# Altium PCB LED Bar Graph Voltage Display.PcbDoc
Units mil, origin at the board's own origin, x right, y up, seen from the top; angles counter-clockwise.
Board outline 1875 x 2290 mil, 2 copper layers (Top Layer, Bottom Layer); 31 components, 27 nets, 92 pads, 17 vias.
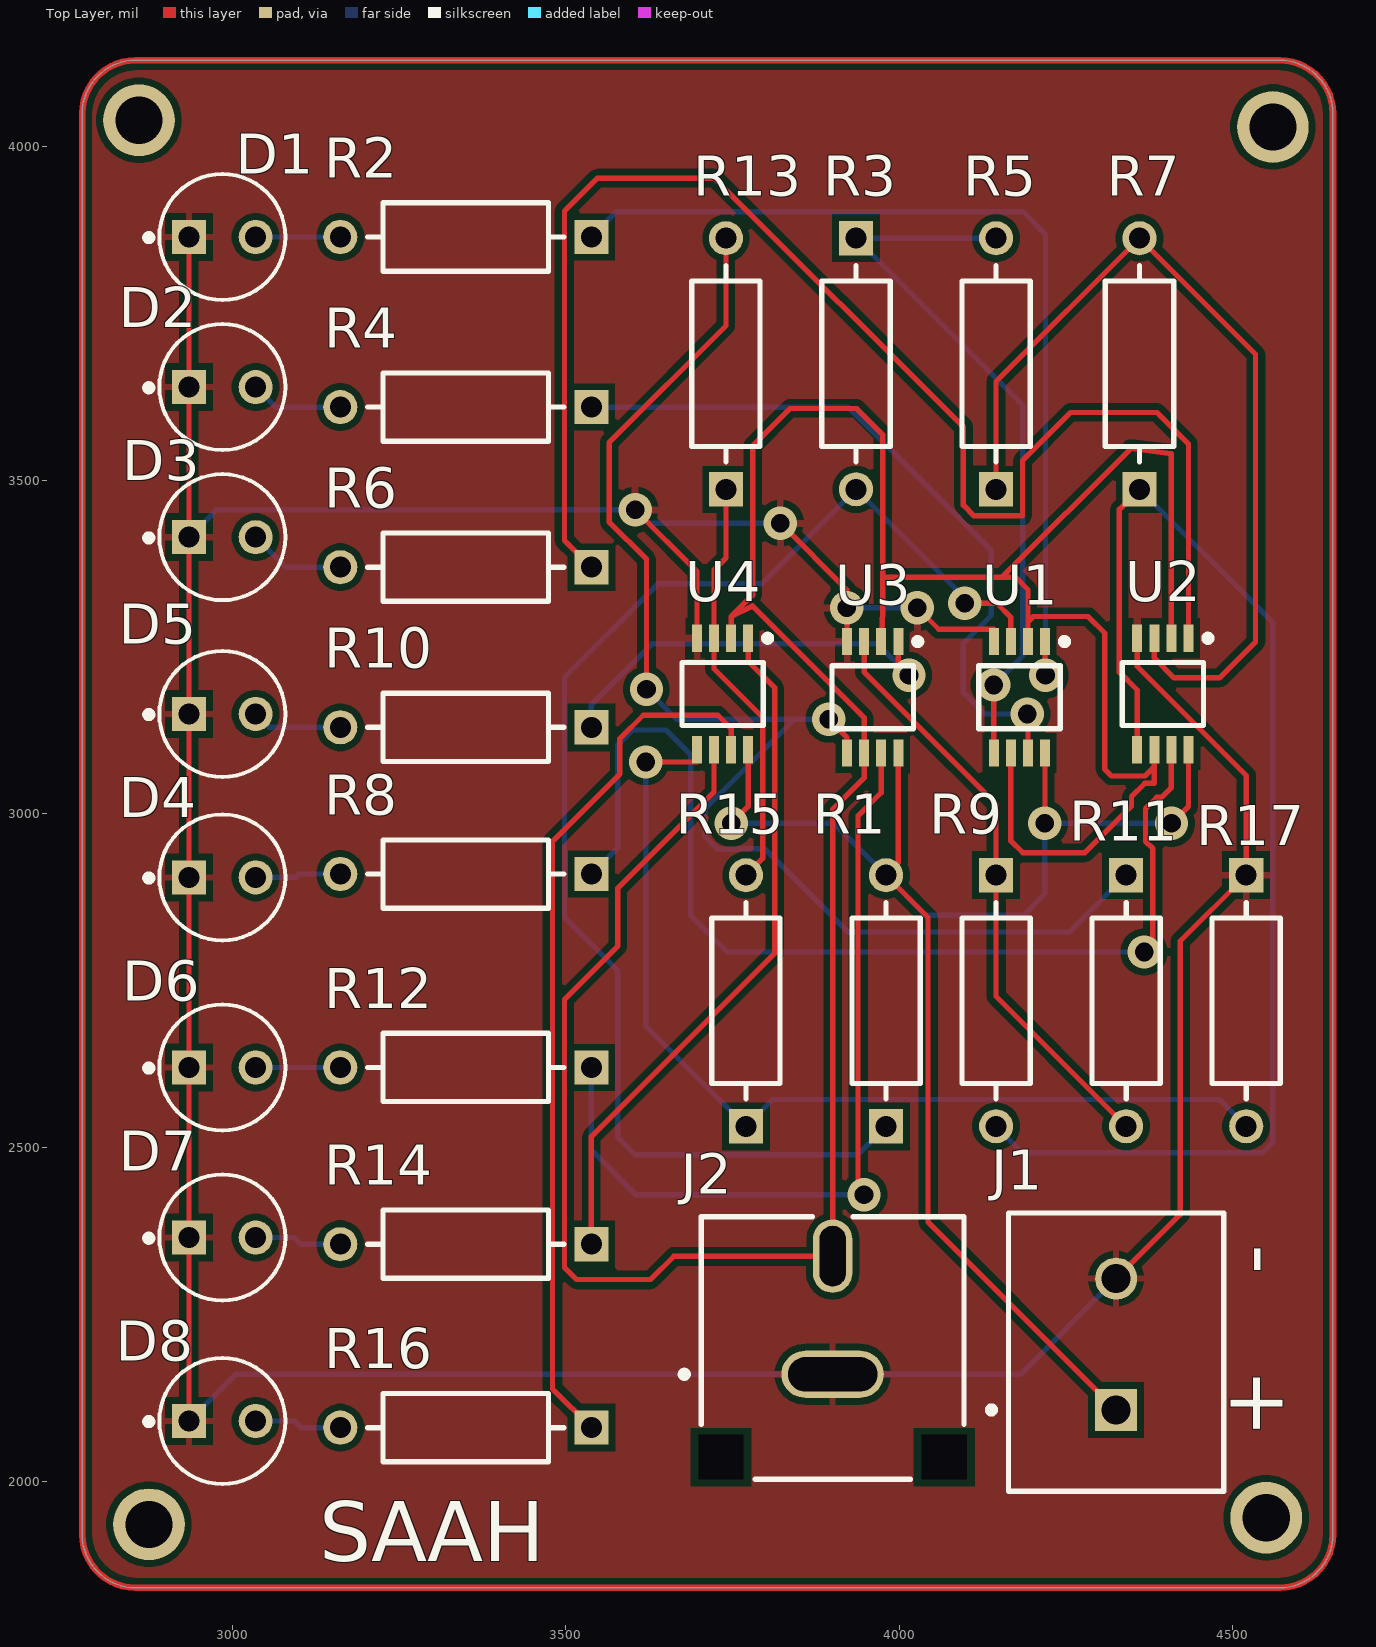
[diagram p0: Top Layer view]
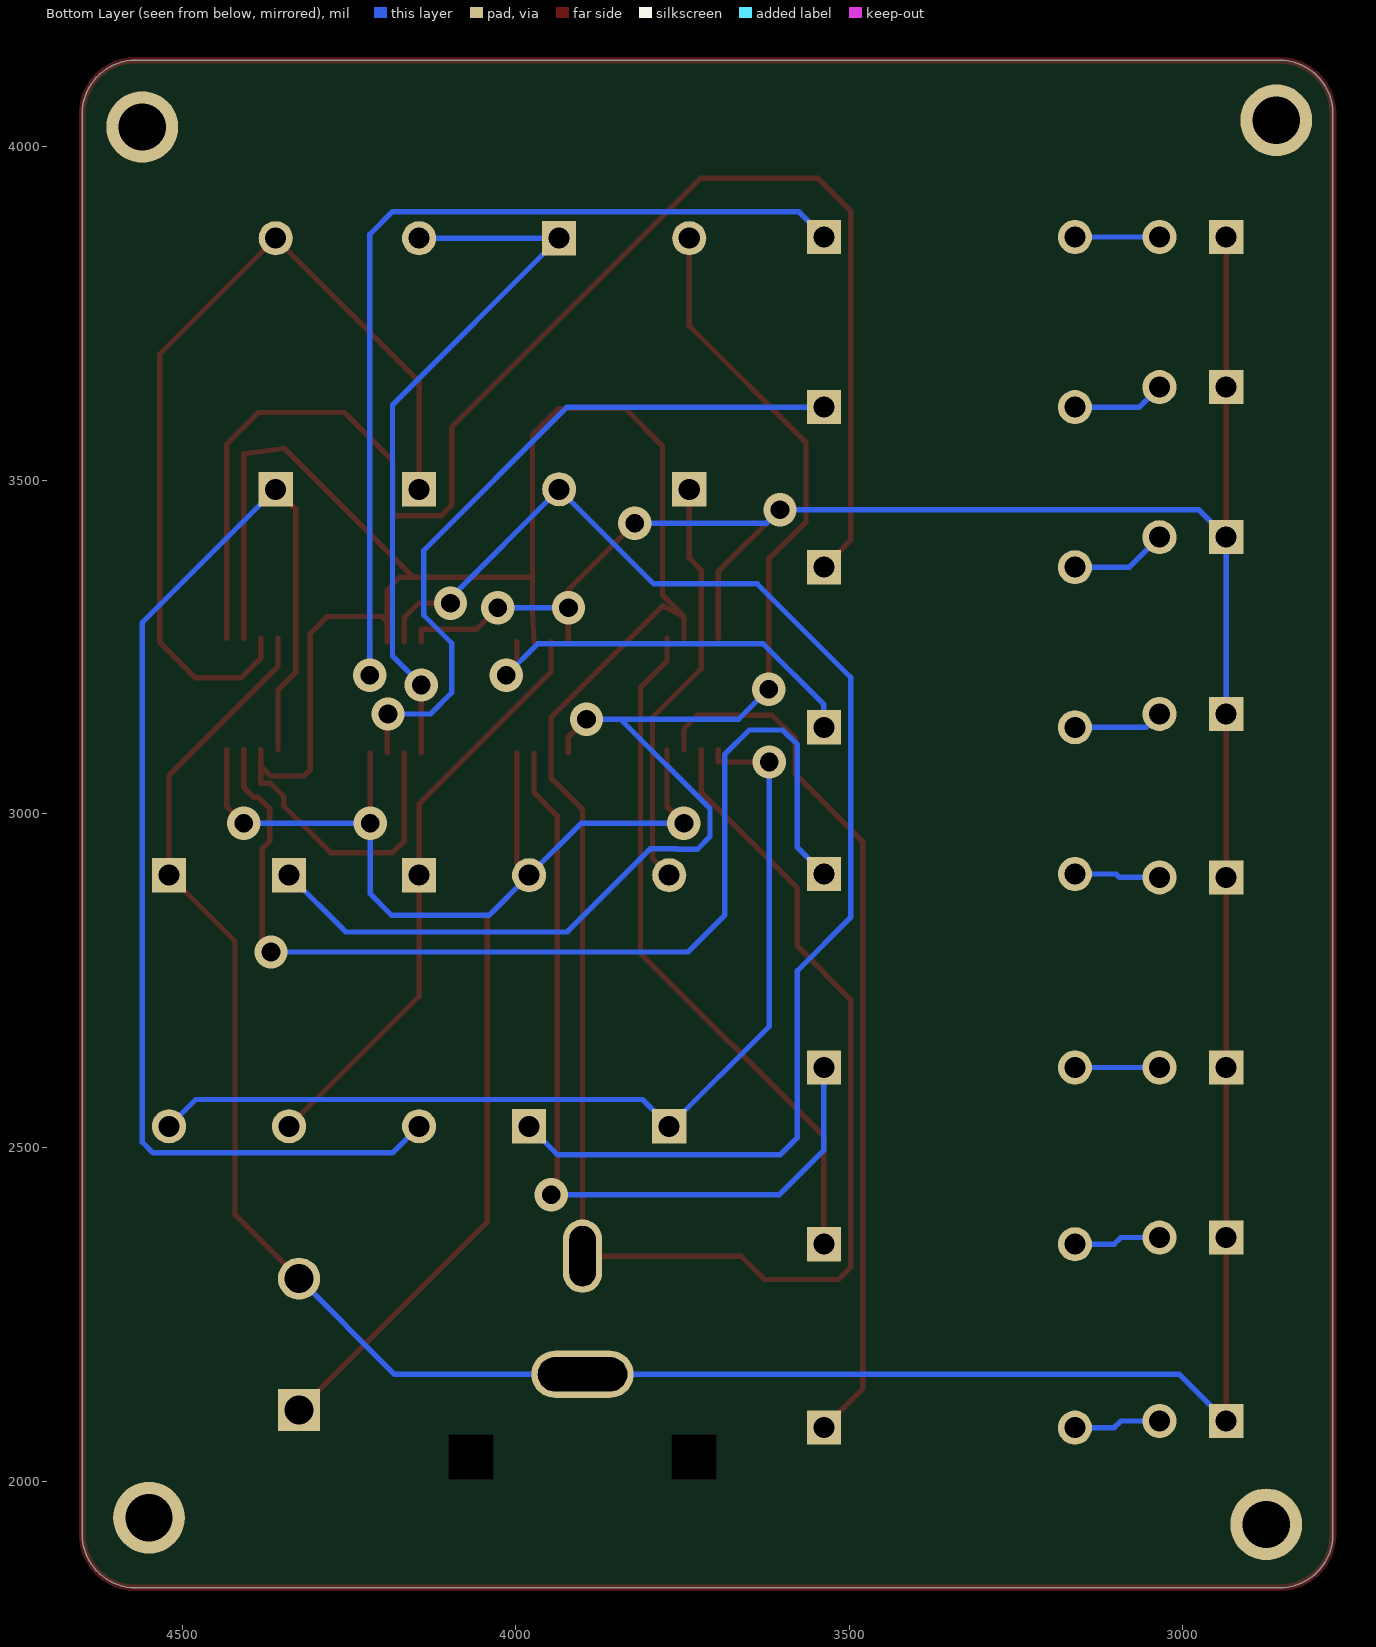
[diagram p1: Bottom Layer view, seen from below]
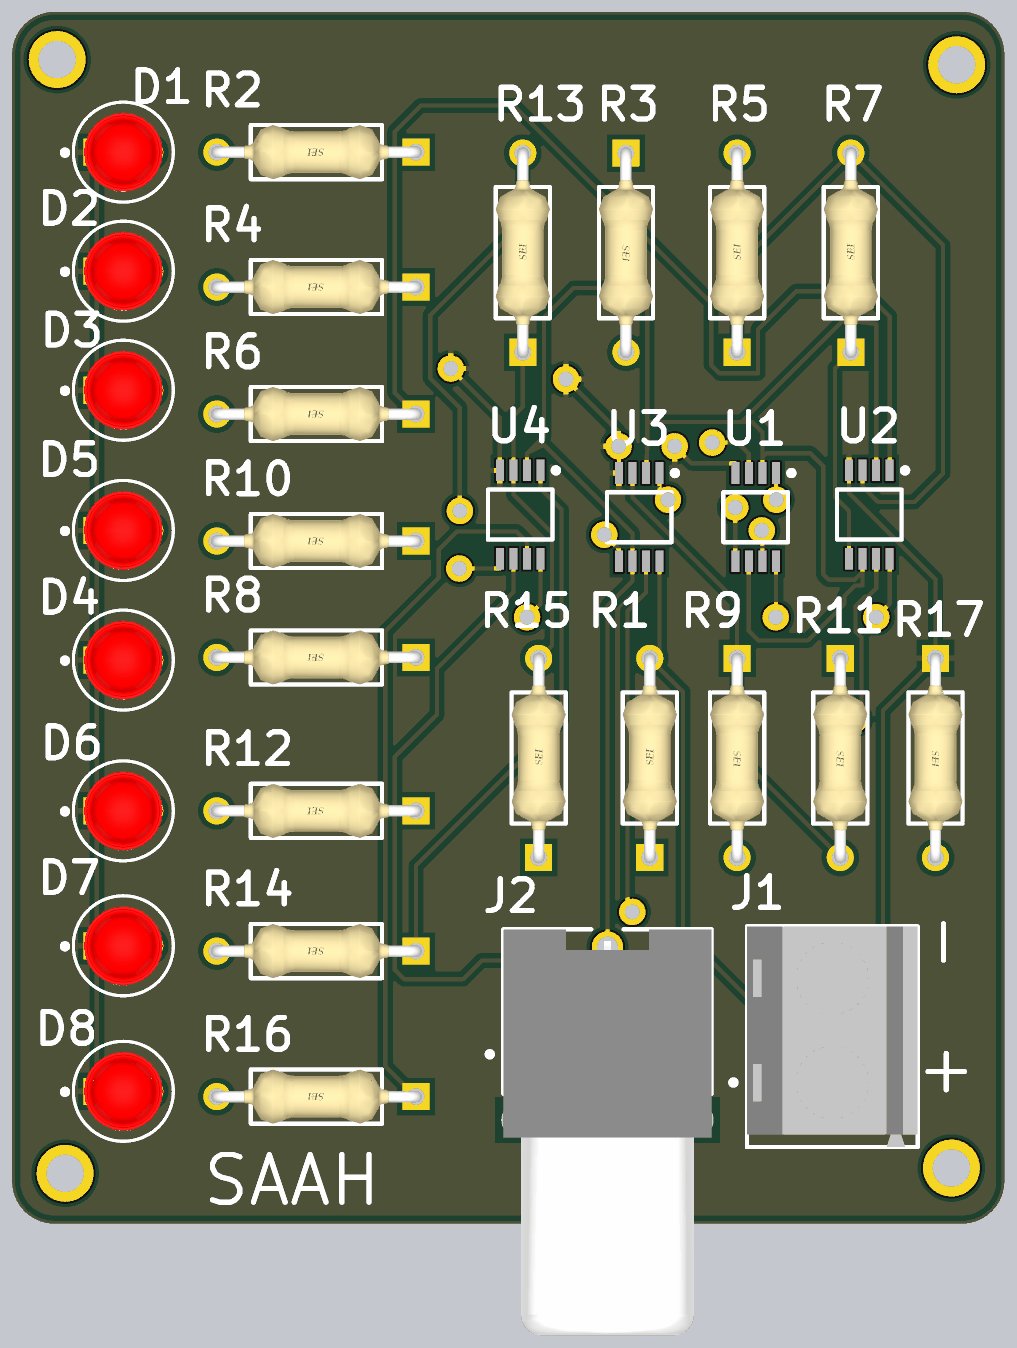
[diagram p2: 3D render of the assembled board from above, using the file's embedded part models]

## Layer stack, top to bottom
Top Solder: solder mask 0.4, Solder Resist, Dk 3.5
Top Layer: signal copper 1.4
Dielectric 1: dielectric 12.6, FR-4, Dk 4.8
Bottom Layer: signal copper 1.4
Bottom Solder: solder mask 0.4, Solder Resist, Dk 3.5

## Board outline
2775,1920 2775,4050 cw(c2855,4050) 2855,4130 4570,4130 cw(c4570,4050) 4650,4050 4650,1920 cw(c4570,1920) 4570,1840 2855,1840 cw(c2855,1920)

## Design rules (kind name [scope] priority, off if disabled: settings)
Clearance [All] p1: gap=10 ignorepadtopadclearanceinfootprint=FALSE
PolygonConnect [All] p1: connectstyle=Relief reliefconductorwidth=10 reliefentries=4 polygonreliefangle="90 Angle" airgapwidth=10
RoutingVias [All] p1: holewidth=28 width=50 viastyle="Through Hole" minholewidth=28 minwidth=50 maxholewidth=28 maxwidth=50
SolderMaskExpansion [All] p1: expansion=4 istentingtop=FALSE
SupplyNets "Schematic Supply Nets_1" [InNet('VCC')] p1: voltage=0.000
SupplyNets "Schematic Supply Nets" [InNet('GND')] p2: voltage=0.000
Width [All] p1: maxlimit=10 minlimit=5 preferedwidth=8 minimp=50.000000 maximp=50.000000 favimp=50.000000
30 further rules are at their usual default settings.

## Components (designator, comment, footprint, x,y, rotation, side; value= is the part's Value field where it differs from the comment)
D1 "LTL-1CHEE" FP-LTL-1CHEE-MFG 2985,3865 r0 top
D2 "LTL-1CHEE" FP-LTL-1CHEE-MFG 2985,3640 r0 top
D3 "LTL-1CHEE" FP-LTL-1CHEE-MFG 2985,3415 r0 top
D4 "LTL-1CHEE" FP-LTL-1CHEE-MFG 2985,2905 r0 top
D5 "LTL-1CHEE" FP-LTL-1CHEE-MFG 2985,3150 r0 top
D6 "LTL-1CHEE" FP-LTL-1CHEE-MFG 2985,2620 r0 top
D7 "LTL-1CHEE" FP-LTL-1CHEE-MFG 2985,2365 r0 top
D8 "LTL-1CHEE" FP-LTL-1CHEE-MFG 2985,2090 r0 top
J1 "282836-2" TECO-282836-2_V 4325,2205 r90 top
J2 "RCJ-041" CUI-RCJ-041_V 3900,2160 r0 top
R1 "1k" FP-CF14-MFG 3980,2720 r90 top
R2 "1k" FP-CF14-MFG 3350,3865 r180 top
R3 "1k" FP-CF14-MFG 3935,3675 r270 top
R4 "1k" FP-CF14-MFG 3350,3610 r180 top
R5 "1k" FP-CF14-MFG 4145,3675 r90 top
R6 "1k" FP-CF14-MFG 3350,3370 r180 top
R7 "1k" FP-CF14-MFG 4360,3675 r90 top
R8 "1k" FP-CF14-MFG 3350,2910 r180 top
R9 "1k" FP-CF14-MFG 4145,2720 r270 top
R10 "1k" FP-CF14-MFG 3350,3130 r180 top
R11 "1k" FP-CF14-MFG 4340,2720 r270 top
R12 "1k" FP-CF14-MFG 3350,2620 r180 top
R13 "1k" FP-CF14-MFG 3740,3675 r90 top
R14 "1k" FP-CF14-MFG 3350,2355 r180 top
R15 "1k" FP-CF14-MFG 3770,2720 r90 top
R16 "1k" FP-CF14-MFG 3350,2080 r180 top
R17 "1k" FP-CF14-MFG 4520,2720 r270 top
U1 "LM358DMR2G" ONSC-MICRO-8-846A-02_H_V 4180,3175 r270 top
U2 "LM358DMR2G" ONSC-MICRO-8-846A-02_H_V 4395,3180 r270 top
U3 "LM358DMR2G" ONSC-MICRO-8-846A-02_H_V 3960,3175 r270 top
U4 "LM358DMR2G" ONSC-MICRO-8-846A-02_H_V 3735,3180 r270 top

## Footprints (in the part's own frame and the unit in brackets; to place one, negate y for a bottom-side part, rotate by r counter-clockwise, add the part's x,y. Pads: shape width x height; smd on the part's side, far side on the other; paste and mask are expansions set on the pad)
CUI-RCJ-041_V [mm] "Jack, 2-Leads, Body 19.5x10mm"
  oval 3.9x1.8 hole 1.3 slot 3.4 at 0 deg: 1(0,0)
  oval 1.5x2.8 hole 1 slot 2.3 at 90 deg: 2(0,4.5)
  round 0 hole 1.7 square unplated: MH1(-4.25,-3.15) MH2(4.25,-3.15)
  silkscreen extent -5.77,-4 5,6, body extent -5,-13.5 5,6, height 11.51
FP-CF14-MFG [mm]
  rect 1.3x1.3 hole 0.8 paste-2539.97 mask+0: 1(-4.78,0)
  round 1.3 hole 0.8 paste-2539.97 mask+0: 2(4.78,0)
  silkscreen extent -3.73,-1.3 3.73,1.3, body extent -5.53,-1.4 5.53,1.4, height 0.25
FP-LTL-1CHEE-MFG [mm]
  rect 1.3x1.3 hole 0.8 paste-2539.97 mask+0: 1(-1.27,0)
  round 1.3 hole 0.8 paste-2539.97 mask+0: 2(1.27,0)
  silkscreen extent -2.92,-2.4 2.4,2.4, body extent -2.15,-2.15 2.15,2.15, height 0.25
ONSC-MICRO-8-846A-02_H_V [mm] "SOIC, 8-Leads, Body 3.1x3.1mm, Pitch 0.65mm"
  rect 1.04x0.38 smd: 1(-2.12,0.975) 2(-2.12,0.325) 3(-2.12,-0.325) 4(-2.12,-0.975) 5(2.12,-0.975) 6(2.12,-0.325) 7(2.12,0.325) 8(2.12,0.975)
  silkscreen extent -2.24,-1.55 1.2,1.84, body extent -1.55,-1.55 1.55,1.55, height 1.1
TECO-282836-2_V [mm] "Female Header, Pitch 5mm, 1 x 2 Position, Height 10mm"
  rect 1.6x1.6 hole 1.1: 1(-2.5,0)
  round 1.6 hole 1.1: 2(2.5,0)
  silkscreen extent -5.6,-4.1 5,4.87, body extent -5.6,-4.1 5,4.1, height 10

## Part data
D1 D2 D3 D4 D5 D6 D7 D8: library part CMP-22017-000040-1, "LED RED CLEAR T/H", Case/Package=T, Color=Red, Forward Current=30mA, Forward Voltage=2V, Max Operating Temperature=100°C, Max Power Dissipation=100mW, Min Operating Temperature=-55°C, Package Quantity=1000, Reverse Voltage=5V, Test Current=10mA, Depth=3.8mm, Diameter=3.1mm, Dominant Wavelength=625nm, Height=5.2mm, Illumination Color=Red, Lead Free="Lead Free", Length=3.8mm, Lens Color=Red, Lens Style=Dome, Lens Transparency=Clear, Luminous Intensity=19mcd, Mount="Through Hole", Number of Elements=1, Number of LEDs=1, Number of Pins=2, Packaging=Bulk, Power Dissipation=100mW, Radiation Hardening=No, RoHS Compliant=Yes, Series=-, Viewing Angle=45°, Wavelength=635nm, Width=3.8mm
J1: library part CMP-1684-00017-1, "Female Header, Pitch 5 mm, 1 x 2 Position, Height 10 mm, Tail Length 3.5 mm, Rohs, Bulk", Color=Green, Current=13.5A, Manufacturer="TE Connectivity", Package Description="Female Header, Pitch 5 mm, 1 x 2 Position, Height 10 mm, Tail Length 3.5 mm", Package Reference=THD, Standard Package=300, Voltage=300V, 3D Model=282836-2.pdf, Category=Connectors,Interconnects, Clamp Material - Plating=Brass-NickelPlated, Contact Material - Plating=Brass-TinPlated, Datasheet URL=http://www.te.com.cn/commerce/DocumentDelivery/DDEController?Action=showdoc&DocId=Catalog+Section%7F1308389_EUROSTYLE_TERMINAL_BLOCKS%7F0607%7Fpdf%7FEnglish%7FENG_CS_1308389_EUROSTYLE_TERMINAL_BLOCKS_0607.pdf%7F282836-2, Dynamic Catalog=BuchananSeries, Family=TerminalBlocks-WiretoBoard, Featured Product=EurostyleTerminalBlockConnectors, Features=Interlocking(Side), Housing Material=Polyamide(PA66),Nylon6/6, Manufacturer URL=http://www.te.com, Mating Orientation=HorizontalwithBoard, Mounting Type=ThroughHole, Number of Levels=1, Other Names="5ULV-02B / A98076", Packaging=Bulk, Pitch="0.197\"(5.00mm)", Positions Per Level=2, Product Training Modules=Wire-to-BoardEurostyleTerminalBlocks, RoHS Information=282836-2StatementofCompliance, Screw Material - Plating=Brass-NickelPlated, Screw Thread=M3, Series=Buchanan, Torque - Screw=0.68Nm(6Lb-In), Wire Gauge=16-30AWG, Wire Termination=Screw-RisingCageClamp
J2: library part CMP-1692-00002-1, "Female RCJ Jack, 2 Position, Height 11.724 mm, Tail Length 4 mm, RoHS, Bulk", Case\Package=Metal, Colour=Black, Current Rating="500 mA", Max Operating Temperature="85 degC", Min Operating Temperature="-55 degC", Package Quantity=400, Voltage Rating="40 V", ComponentLink1Description="Manufacturer URL", ComponentLink1URL=http://www.cui.com/, ComponentLink2Description=Datasheet, ComponentLink2URL=http://www.cui.com/product/resource/rcj-04x.pdf, Connector Type=HDMI, Contact Material=Copper, Contact Plating=Gold, DatasheetVersion="Rev. B, 02/2012", Gender=Female, Height="6.1 mm", Lead Pitch="0.5 mm", Length="16.2 mm", Mount="Surface Mount", PackageDescription="Female RCJ Jack, 2 Position, Height 11.724 mm, Tail Length 4 mm", PackageReference=RCJ-041, Packaging="Tape and Reel", Pins=19, REACH SVHC="No SVHC", RoHSCompliant=true
R1 R2 R3 R4 R5 R6 R7 R8 R9 R10 R11 R12 R13 R14 R15 R16 R17: library part CMP-26528-000003-1, "RES 7.5K OHM 1/4W 5% AXIAL", Case/Package=Axial, Max Operating Temperature=155°C, Max Power Dissipation=250mW, Min Operating Temperature=-55°C, Resistance=7.5kR, Resistor Type="Carbon Film", Temperature Coefficient=-400ppm/°C, Tolerance=5%, Contact Plating=Tin, Diameter=2.3mm, Features="Flame Retardant Coating", Lead Free="Lead Free", Length=0.256inch, Mount="Through Hole", Number of Terminations=2, Packaging="Tape and Reel", Power Rating=250mW, Radiation Hardening=No, RoHS Compliant=Yes, Series=CF
U1 U2 U3 U4: library part CMP-1310-00018-1, "Single Supply Dual Operational Amplifier, 3 to 32 V, 0 to 70 degC, 8-Pin MICRO, Pb-Free, Tape and Reel", Manufacturer="On Semiconductor", ComponentLink1Description="Manufacturer URL", ComponentLink1URL=http://www.onsemi.com/, ComponentLink2Description=Datasheet, ComponentLink2URL=http://www.onsemi.cn/pub_link/Collateral/LM358-D.PDF, ComponentLink3Description="Package Specification", ComponentLink3URL=http://www.onsemi.com/pub_link/Collateral/NLSV2T244-D.PDF, DatasheetVersion="Rev. 27", Mounting Technology="Surface Mount", PackageDescription="8-Pin Small Outline Package, Body 3 x 3 mm, Pitch 0.65 mm", PackageReference=MICRO-8-846A-02_H, PackageVersion="Rev. H", Packing="Tape and Reel", PartNumber=LM358DMR2G, RoHS=TRUE, VCC Max (V)=32, VCC Min (V)=3

## Free pads (board coordinates)
  round 107.48 hole 70.71: 6(4560,4030) 7(2860,4040) 8(2875,1935) 9(4550,1945)

## Via types
v1: diameter 50, hole 28, Top Layer to Bottom Layer, 17 vias

## Nets (pads, with @x,y where several pads share a name; then routed paths per layer and width w, separated by ;. In a path a pad name is that pad's centre, name@x,y a point inside that pad or via, vN(x,y) a via of type N, cw(c..) or ccw(c..) an arc to the next point about the centre after c; other vN are vias at no path point)
GND: D1.1 D2.1 D3.1 D4.1 D5.1 D6.1 D7.1 D8.1 J1.2 J2.1 R17.1 U1.4 U2.4 U3.4 U4.4 | length 6241.9
  Top Layer w8: D8.1 D7.1 D6.1 D4.1 D5.1 D3.1 D2.1 D1.1 ; v1(3604,3456) 3696.61,3363.39 U4.4 ; v1(3821.61,3436) 3921.61,3336 v1@3921.61,3308.39 ; v1(3921,3309) v1@3921.61,3308.39 ; U3.4 v1@3921.61,3308.39 ; v1(4027,3309) 4059,3277 4141.61,3277 U1.4 ; J1.2 4421,2399.43 4421,2809.19 R17.1 4520,3057.8 4356.61,3221.18 U2.4
  Bottom Layer w8: D8.1 3005,2160 J2.1 4181.57,2160 J1.2 ; D5.1 D3.1 2976,3456 v1(3604,3456) 3624,3436 v1(3821.61,3436) ; v1(3921,3309) v1(4027,3309)
NetD1_2: D1.2 R2.2 | length 126.8
  Bottom Layer w8: D1.2 R2.2
NetD2_2: D2.2 R4.2 | length 139.2
  Bottom Layer w8: D2.2 3065,3610 R4.2
NetD3_2: D3.2 R6.2 | length 145.5
  Bottom Layer w8: D3.2 3080,3370 R6.2
NetD4_2: D4.2 R8.2 | length 128.9
  Bottom Layer w8: D4.2 3095,2905 3100,2910 R8.2
NetD5_2: D5.2 R10.2 | length 135.1
  Bottom Layer w8: D5.2 3055,3130 R10.2
NetD6_2: D6.2 R12.2 | length 126.8
  Bottom Layer w8: D6.2 R12.2
NetD7_2: D7.2 R14.2 | length 131
  Bottom Layer w8: D7.2 3093,2365 3103,2355 R14.2
NetD8_2: D8.2 R16.2 | length 131
  Bottom Layer w8: D8.2 3093,2090 3103,2080 R16.2
NetJ2_2: J2.2 U1.2 U1.6 U2.2 U2.6 U3.2 U3.6 U4.2 U4.6 | length 5027.3
  Top Layer w8: U4.6 3722.2,3033 3578,2888.8 3578,2802 3498,2722 3498,2320 3516,2302 3627,2302 3662,2337 3900,2337 J2.2 3900,3006.8 3947.2,3054 U3.6 3947.2,3144.59 3779.8,3312 3747.8,3295.8 ; U4.2 3747.8,3295.8 ; U3.2 3975,3302.61 3975,3355 ; U1.6 4167.2,2959.8 4185,2942 4278.14,2942 4347.95,3011.81 4347.95,3026 4368,3046.05 4382.19,3046.05 4382.2,3071.2 ; U1.2 4192.8,3288 ; U2.6 4382.2,3071.2 ; U2.2 4407.8,3540.2 4347,3548 4154,3355 ; 3747.8,3295.8 3780,3328 3780,3552 3836,3608 3936,3608 3975,3569 3975,3355 ; 3975,3355 4154,3355 ; 4154,3355 4174,3355 4192.8,3336.2 4192.8,3288 ; 4192.8,3288 4200.8,3296 4283,3296 4308,3271 4308,3067 4318,3057 4368,3057 4382.2,3071.2
NetR1_1: R1.1 R3.2 U1.3 | length 2060
  Top Layer w8: v1(4098,3316) 4146,3316 4167.2,3294.8 U1.3
  Bottom Layer w8: R1.1 3937.19,2489 3604,2489 3578,2515 3578,2765 3498,2845 3498,3205 3638,3345 3793.19,3345 R3.2 4098,3323.81 v1(4098,3316)
NetR2_1: R2.1 U1.1 | length 1422.4
  Top Layer w8: U1.1 4218.39,3208.61 v1(4219,3208)
  Bottom Layer w8: R2.1 3576.19,3903 4185,3903 4219,3869 v1(4219,3208)
NetR3_1: R3.1 R5.2 U1.5 | length 1103.2
  Top Layer w8: U1.5 v1(4141.61,3193.39)
  Bottom Layer w8: v1(4141.61,3193.39) 4185,3236.77 4185,3613.19 R3.1 R5.2
NetR4_1: R4.1 U1.7 | length 1087.1
  Top Layer w8: v1(4191.59,3150) 4192.8,3148.8 U1.7
  Bottom Layer w8: R4.1 3923,3610 4138,3395 4138,3298 4096,3256 4096,3182 4128,3150 v1(4191.59,3150)
NetR5_1: R5.1 R7.2 U2.3 | length 1358.9
  Top Layer w8: R5.1 4145,3648.19 R7.2 4534,3689.19 4534,3258.01 4480,3204.01 4411.99,3204.01 4382.2,3233.8 U2.3
NetR6_1: R6.1 U2.1 | length 2208.1
  Top Layer w8: R6.1 3498,3410.19 3498,3904 3547,3953 3723,3953 4096,3580 4096,3463 4112,3447 4184.59,3447 4184.59,3530 4256.59,3602 4386,3602 4433.39,3554.61 U2.1
NetR7_1: R7.1 R9.2 U2.5 | length 1913.7
  Top Layer w8: U2.5 4356.61,3185.77 4329.81,3212.58 4329.81,3456.62 R7.1
  Bottom Layer w8: R9.2 4184.81,2492 4544,2492 4560,2508 4560,3286.81 R7.1
NetR8_1: R8.1 U2.7 | length 1621.2
  Top Layer w8: v1(4367,2793) 4380,2806 4380,2948 4369,2959 4369,3008 4386,3025 4392.8,3025 4407.8,3040 U2.7
  Bottom Layer w8: R8.1 3578,2949.81 3578,3104 3600,3126 3650,3126 3687,3089 3687,2848 3742,2793 v1(4367,2793)
NetR9_1: R9.1 R11.2 U3.3 | length 889.4
  Top Layer w8: U3.3 3947.2,3212.8 4145,3015 R9.1 4145,2726.81 R11.2
NetR10_1: R10.1 U3.1 | length 624.6
  Top Layer w8: U3.1 3998.39,3224 v1(4014.39,3208)
  Bottom Layer w8: R10.1 3538.19,3164.19 3629,3255 3967.39,3255 v1(4014.39,3208)
NetR11_1: R11.1 R13.2 U3.5 | length 2083.3
  Top Layer w8: v1(3621,3187) 3621,3382 3565,3438 3565,3557 3740,3732 R13.2 ; v1(3894,3142) 3921.61,3114.39 U3.5
  Bottom Layer w8: v1(3621,3187) 3666,3142 3843,3142 ; v1(3894,3142) 3843,3142 ; R11.1 4254.81,2823 3923,2823 3798,2948 3759,2948 3758,2947 3728,2947 3709,2966 3709,3008 3843,3142
NetR12_1: R12.1 U3.7 | length 1241.2
  Top Layer w8: v1(3947,2429) 3938,2438 3938,2997.2 3972.8,3032 U3.7
  Bottom Layer w8: R12.1 3538.19,2496 3605.19,2429 v1(3947,2429)
NetR13_1: R13.1 R15.2 U4.3 | length 626.5
  Top Layer w8: R13.1 3740,3383.8 3722.2,3366 U4.3 3722.2,3217.8 3795,3145 3795,2933.19 R15.2
NetR14_1: R14.1 U4.1 | length 1038.7
  Top Layer w8: R14.1 3538.19,2516.19 3813,2791 3813,3189.38 3773.39,3228.99 U4.1
NetR15_1: R15.1 R17.2 U4.5 | length 1486.8
  Top Layer w8: v1(3620,3078) 3696.61,3078 U4.5
  Bottom Layer w8: v1(3620,3078) 3620,2681.81 R15.1 3810.19,2572 4479.81,2572 R17.2
NetR16_1: R16.1 U4.7 | length 1320.1
  Top Layer w8: R16.1 3480,2138.19 3480,2959 3581,3060 3581,3113 3616,3148 3728,3148 3747.8,3128.2 U4.7
VCC: J1.1 R1.2 U1.8 U2.8 U3.8 U4.8 | length 2319.7
  Top Layer w8: v1(3748,2986) 3773.39,3011.39 U4.8 ; U3.8 3998.39,2926.58 R1.2 4043,2845.19 4043,2388.57 J1.1 ; v1(4218,2986) 4218.39,2986.39 U1.8 ; v1(4408,2986) 4433.39,3011.39 U2.8
  Bottom Layer w8: v1(3748,2986) 3902.19,2986 R1.2 4040.19,2848 4186,2848 4218,2880 v1(4218,2986) v1(4408,2986)
pads on no net: J2.MH1 J2.MH2
copper on no net: | length 8192.7
  Top Layer w10: 2775,1920 ccw(c2855,1920) 2855,1840 4570,1840 ccw(c4570,1920) 4650,1920 4650,4050 ccw(c4570,4050) 4570,4130 2855,4130 ccw(c2855,4050) 2775,4050 2775,1920

## Polygon pours and split planes (outlines as drawn)
GND on Top Layer "GND_L01_P001" (solid, pour order 1): 2775,1920 2775,4050 cw(c2855,4050) 2855,4130 4570,4130 cw(c4570,4050) 4650,4050 4650,1920 cw(c4570,1920) 4570,1840 2855,1840 cw(c2855,1920)

## Silkscreen, mask and mechanical layers (free items; w line width, h text height)
Top Overlay:
  text "-" at 4569.99,2310 h90 r90
  text "+" at 4575,2065 h90 r90
  text "SAAH" at 3130,1880 h90

## Text inside footprints (layer, text, board x,y; h text height)
J2: Mechanical 1 "PCB Edge" at 4136.22,2010.39 h23.62